# Altium PCB MOS双电机驱动.PcbDoc
Units mm, origin at the board's own origin, x right, y up, seen from the top; angles counter-clockwise.
Board outline 90 x 50 mm, 2 copper layers (Top Layer, Bottom Layer); 67 components, 44 nets, 198 pads, 182 vias.
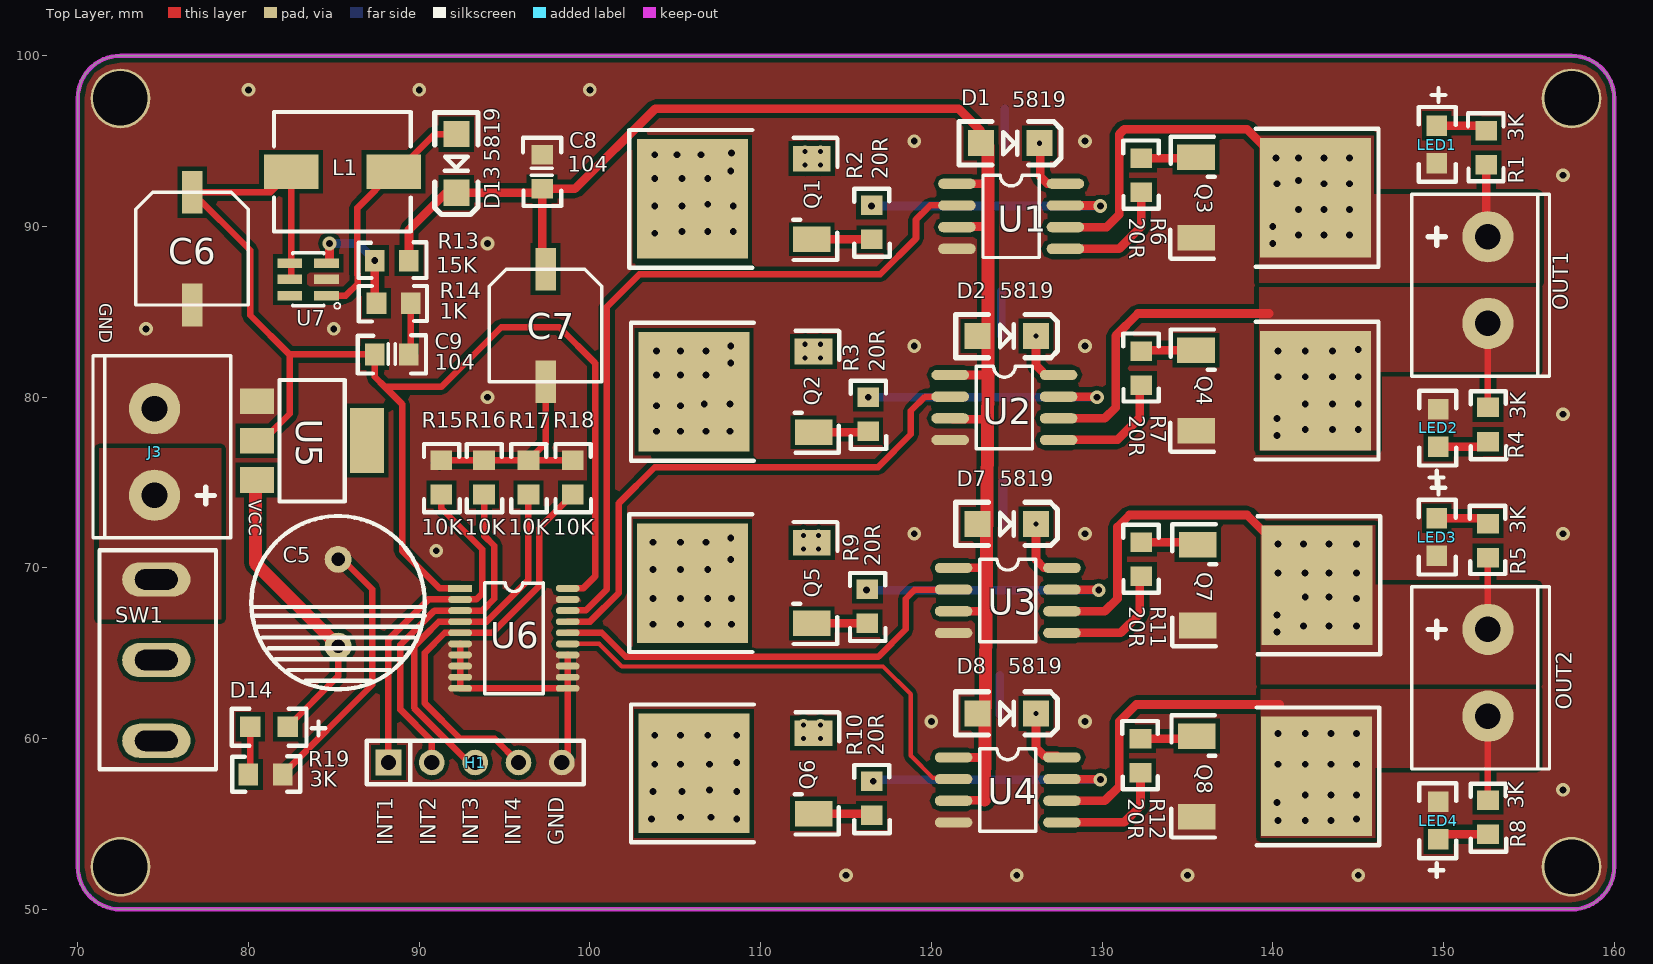
[diagram p0: Top Layer view]
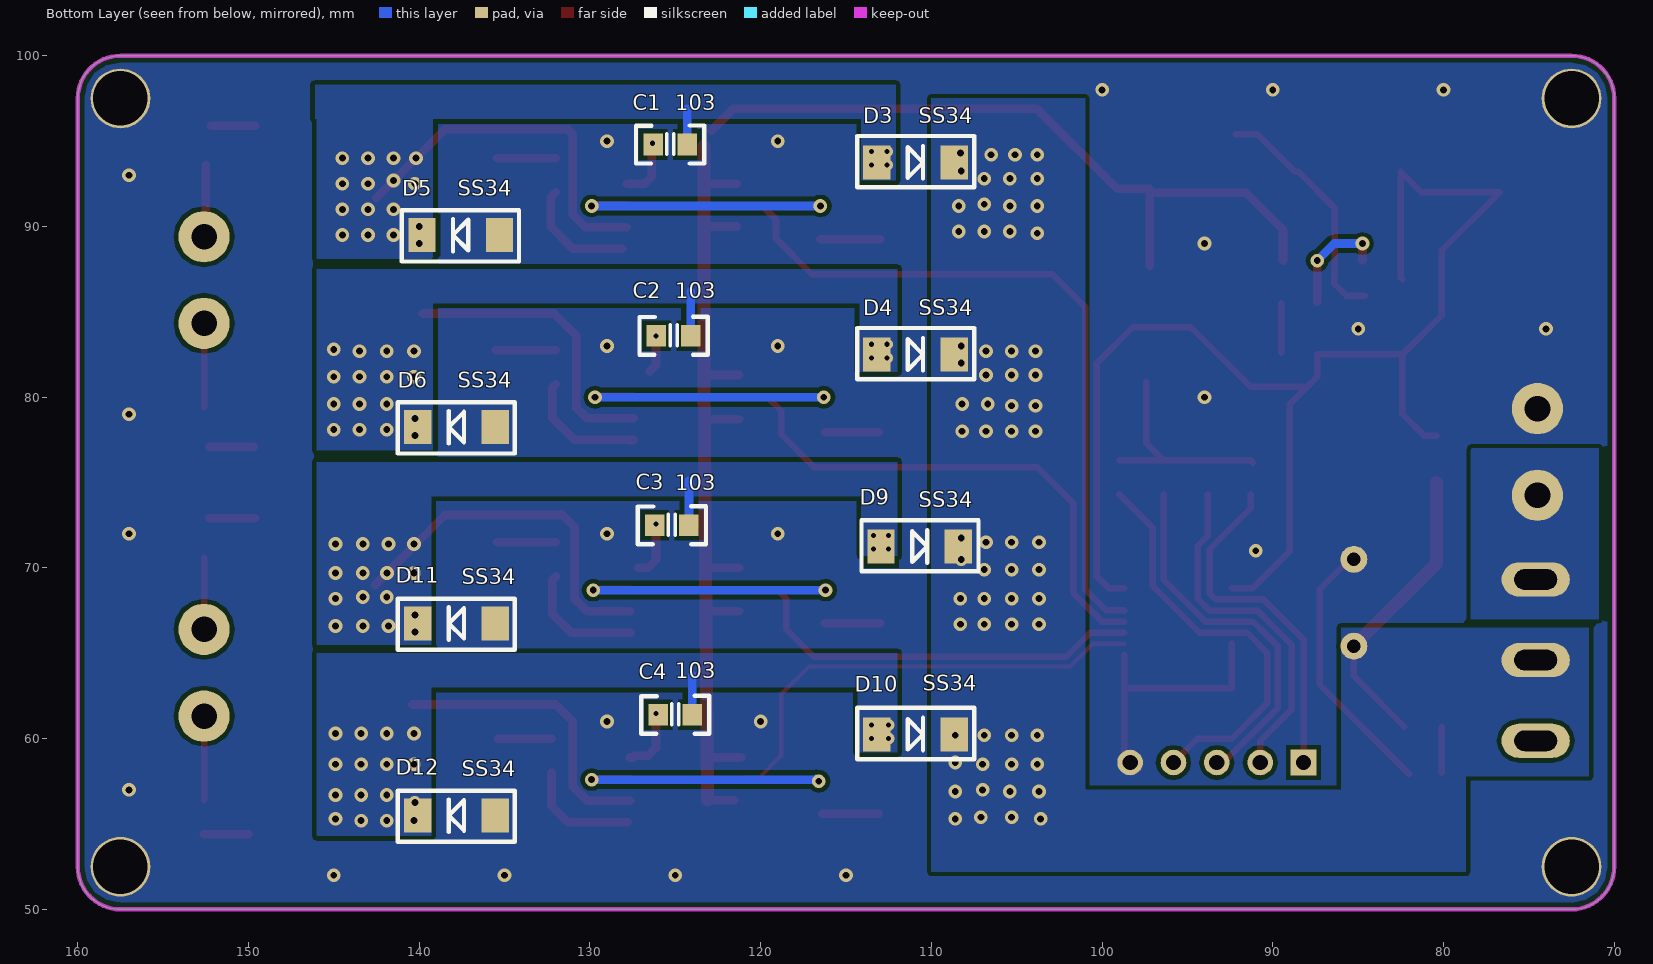
[diagram p1: Bottom Layer view, seen from below]
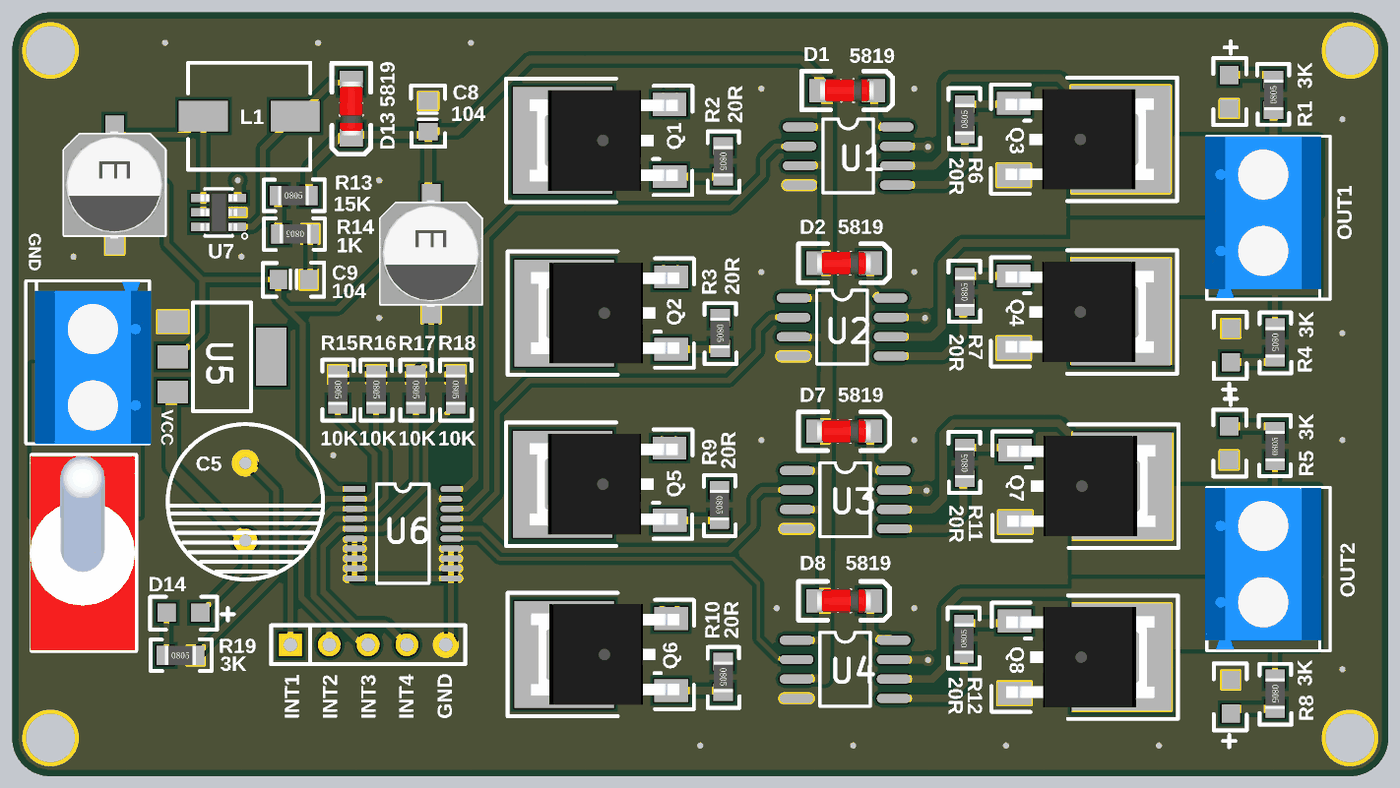
[diagram p2: 3D render of the assembled board from above, using the file's embedded part models]
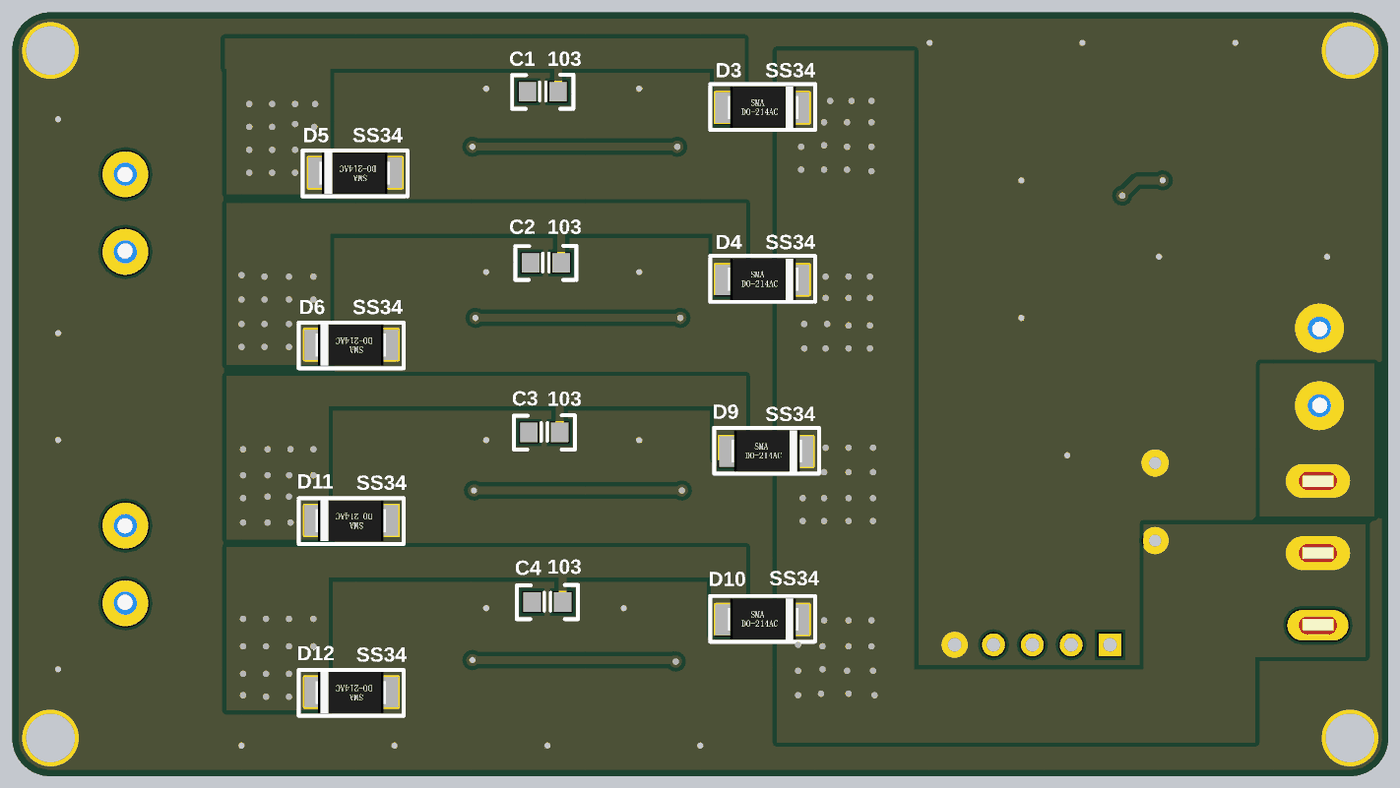
[diagram p3: 3D render of the assembled board from below, using the file's embedded part models]

## Layer stack, top to bottom
Top Solder: solder mask 0.0102, Solder Resist, Dk 3.5
Top Layer: signal copper 0.0356
Dielectric 1: dielectric 0.32, FR-4, Dk 4.8
Bottom Layer: signal copper 0.0356
Bottom Solder: solder mask 0.0102, Solder Resist, Dk 3.5

## Board outline
70,52.5 ccw(c72.5,52.5) 72.5,50 157.5,50 ccw(c157.5,52.5) 160,52.5 160,97.5 ccw(c157.5,97.5) 157.5,100 72.5,100 ccw(c72.5,97.5) 70,97.5

## Design rules (kind name [scope] priority, off if disabled: settings)
Clearance [All] p1: gap=0.254
PlaneConnect [All] p1: planeconnectstyle=Direct reliefexpansion=0.508 reliefentries=4 reliefconductorwidth=0.254 reliefairgap=0.254
PolygonConnect [All] p1: connectstyle=Direct reliefconductorwidth=0.254 reliefentries=4 polygonreliefangle="90 Angle" airgapwidth=0.254
RoutingVias [All] p1: holewidth=0.711 width=1.27 viastyle="Through Hole" minholewidth=0.711 minwidth=1.27 maxholewidth=0.711 maxwidth=1.27
SolderMaskExpansion [All] p1: expansion=0.102
Width [All] p1: maxlimit=2.54 minlimit=0.254 preferedwidth=0.381
29 further rules are at their usual default settings.

## Components (designator, comment, footprint, x,y, rotation, side; value= is the part's Value field where it differs from the comment)
C1 "103" "C 0805" 125.3,94.8 r180 bottom
C2 "103" "C 0805" 125.1,83.6 r180 bottom
C3 "103" "C 0805" 125.2,72.5 r180 bottom
C4 "103" "C 0805" 125,61.4 r180 bottom
C5 "1000uF" 直插电解电容10 85.25,70.5 r90 top
C6 "220uF" CAP6.6X6.6 76.7,85.4 r180 top
C7 "220uF" CAP6.6X6.6 97.4,80.9 r180 top
C8 "104" "C 0805" 97.2,93.2 r90 top
C9 "104" "C 0805" 88.4,82.5 r0 top
D1 "5819" D1206 124.7,94.8 r0 top
D2 "5819" D1206 124.5,83.5 r0 top
D3 "SS34" SMA 113,93.75 r180 bottom
D4 "SS34" SMA 113,82.5 r180 bottom
D5 "SS34" SMA 135.5,89.5 r0 bottom
D6 "SS34" SMA 135.75,78.25 r0 bottom
D7 "5819" D1206 124.5,72.5 r0 top
D8 "5819" D1206 124.5,61.4 r0 top
D9 "SS34" SMA 112.75,71.25 r180 bottom
D10 "SS34" SMA 113,60.25 r180 bottom
D11 "SS34" SMA 135.75,66.75 r0 bottom
D12 "SS34" SMA 135.75,55.5 r0 bottom
D13 "5819" D1206 92.1,93.6 r270 top
D14 "LED" 0805LED 81.2,60.6 r180 top
H1 "H?" SIP05 88.2,58.6 r0 top
J3 "Header2" 2PIN-5.08B 74.5,74.25 r90 top
L1 "15uH" L-06030 85.5,93.2 r0 top
LED1 "LED" 0805LED 149.7,94.8 r270 top
LED2 "LED" 0805LED 149.6,78.2 r90 top
LED3 "LED" 0805LED 149.7,71.8 r270 top
LED4 "LED" 0805LED 149.6,55.2 r90 top
OUT1 "Header2" 2PIN-5.08B 152.6,89.4 r270 top (schematic designator J1)
OUT2 "Header2" 2PIN-5.08B 152.6,66.4 r270 top (schematic designator J2)
Q1 "N-MOS" TO-252 113,89.25 r90 top
Q2 "N-MOS" TO-252 113.1,77.95 r90 top
Q3 "N-MOS" TO-252 135.5,94.05 r270 top
Q4 "N-MOS" TO-252 135.5,82.75 r270 top
Q5 "N-MOS" TO-252 113,66.75 r90 top
Q6 "N-MOS" TO-252 113.1,55.6 r90 top
Q7 "N-MOS" TO-252 135.6,71.35 r270 top
Q8 "N-MOS" TO-252 135.55,60.15 r270 top
R1 "3K" "R 0805" 152.5,94.6 r90 top
R2 "20R" "R 0805" 116.5,90.25 r270 top
R3 "20R" "R 0805" 116.3,79 r270 top
R4 "3K" "R 0805" 152.6,78.4 r270 top
R5 "3K" "R 0805" 152.6,71.6 r90 top
R6 "20R" "R 0805" 132.3,93 r90 top
R7 "20R" "R 0805" 132.3,81.7 r90 top
R8 "3K" "R 0805" 152.6,55.4 r270 top
R9 "20R" "R 0805" 116.25,67.75 r270 top
R10 "20R" "R 0805" 116.5,56.5 r270 top
R11 "20R" "R 0805" 132.3,70.5 r90 top
R12 "20R" "R 0805" 132.25,59 r90 top
R13 "15K" "R 0805" 88.4,88 r0 top
R14 "1K" "R 0805" 88.5,85.5 r180 top
R15 "10K" "R 0805" 91.3,75.3 r270 top
R16 "10K" "R 0805" 93.8,75.3 r270 top
R17 "10K" "R 0805" 96.4,75.3 r270 top
R18 "10K" "R 0805" 99,75.3 r270 top
R19 "3K" "R 0805" 81,57.9 r0 top
SW1 "SW-C" SW-TO3 74.6,64.6 r180 top
U1 "IR2104S" SOP-8 121.5,92.5 r0 top
U2 "IR2104S" SOP-8 121.1,81.3 r0 top
U3 "IR2104S" SOP-8 121.3,70 r0 top
U4 "IR2104S" SOP-8 121.3,58.9 r0 top
U5 "U?" SOT223 80.5,79.75 r270 top
U6 "74HC245" TSSOP-20 92.4,68.8 r0 top
U7 "MT3608" SOT23-6 83.5,86.9 r270 top

## Footprints (in the part's own frame and the unit in brackets; to place one, negate y for a bottom-side part, rotate by r counter-clockwise, add the part's x,y. Pads: shape width x height; smd on the part's side, far side on the other; paste and mask are expansions set on the pad)
2PIN-5.08B [mm] "3A"
  round 3 hole 1.5: 1(0,0) 2(5.08,0)
  silkscreen extent -2.49,-4.47 8.18,3.61, body extent -2.48,-4.58 8.12,3.02, height 10
0805LED [mm]
  rect 1.2x1.2 smd: 1(-1.1,-0.1) 2(1.1,-0.1)
  silkscreen extent -3.3,-1.14 2.18,1.02, body extent -1,-0.7 1,0.5, height 0.6
"C 0805" [mm]
  rect 1.143x1.27 smd: 1(-1,0) 2(1,0)
  silkscreen extent -2,-1.12 2,1.12, body extent -1,-0.5 1,0.5, height 0.51
CAP6.6X6.6 [mm] "SMDC"
  rect 1.2x2.5 smd: 1(0,0) 2(0,-6.6)
  silkscreen extent -3.3,-6.6 3.3,0, body extent -3.27,-6.8 3.33,0.2, height 5.2
D1206 [mil] "1/4W"
  rect 60x60 smd: 1(-71,3) 2(64,3)
  silkscreen extent -121,-47 114,53, body extent -73,-27 65,33, height 59
L-06030 [mm]
  rect 3.2x2 smd: 1(-3,0) 2(3,0)
  silkscreen extent -4,-3.5 4,3.5, body extent -3.7,-3.2 3.7,3.2, height 3
"R 0805" [mm]
  rect 1.143x1.27 smd: 1(-1,0) 2(1,0)
  silkscreen extent -1.96,-1.02 2.03,1.07, body extent -1,-0.63 1,0.63, height 0.55
SIP05 [mm]
  rect 1.5x1.5 hole 0.9: 1(0,0)
  round 1.5 hole 0.9: 2(2.54,0) 3(5.08,0) 4(7.62,0) 5(10.16,0)
  silkscreen extent -1.27,-1.27 11.43,1.27
SMA [mil] "DO-214AC(2010)"
  rect 63x78.74 smd: 1(-8,0) 2(170.56,0)
  silkscreen extent -53,-57 217,61, body extent -8,-52 174,54, height 94
SOP-8 [mm]
  oval 2.2x0.6 smd: 1(0,0) 2(0,-1.27) 3(0,-2.54) 4(0,-3.81) 5(6.35,-3.81) 6(6.35,-2.54) 7(6.35,-1.27) 8(6.35,0)
  silkscreen extent 1.52,-4.32 4.83,0.51, body extent 0,-4.32 6.35,0.51, height 2
SOT23-6 [mm] "SOT-23/SC-74A; 5 Leads; Body 3.1 x 3 mm, inc. leads (LxW max)"
  rect 0.55x1.45 smd: 1(0.95,1.075) 2(0,1.075) 3(-0.95,1.075) 4(-0.95,-1.075) 5(0,-1.075) 6(0.95,-1.075)
  silkscreen extent -1.55,-0.9 1.73,1.88, body extent -1.4,-1.19 1.4,1.23, height 1.08
SOT223 [mil]
  rect 150x79 smd: 0(89.88,253.54)
  rect 59x79 smd: 1(0,0) 2(90.55,0) 3(181.1,0)
  silkscreen extent -49,52 231,202, body extent -39,-12 217,276, height 39
SW-TO3 [mm]
  oval 4x2 hole 1.2 slot 2.5 at 0 deg: 1(0,-4.724) 2(0,0) 3(0,4.724)
  silkscreen extent -3.5,-6.43 3.33,6.39, body extent -3.43,-6.36 3.43,6.35, height 28.55
TO-252 [mm]
  rect 1.5x2.2 smd: 1(0,0) 3(4.723,0.004)
  rect 7x6.5 smd: 2(2.361,7)
  silkscreen extent -1.68,-1.5 6.4,10.69, body extent -0.93,-0.53 5.65,9.17, height 2.3
TSSOP-20 [mm]
  rect 1.4x0.4 smd: 1(0,0)
  oval 1.4x0.4 smd: 2(0,-0.65) 3(0,-1.3) 4(0,-1.95) 5(0,-2.6) 6(0,-3.25) 7(0,-3.9) 8(0,-4.55) 9(0,-5.2) 10(0,-5.85) 11(6.3,-5.85) 12(6.3,-5.2) 13(6.3,-4.55) 14(6.3,-3.9) 15(6.3,-3.25) 16(6.3,-2.6) 17(6.3,-1.95) 18(6.3,-1.3) 19(6.3,-0.65) 20(6.3,0)
  silkscreen extent 1.43,-6.17 4.87,0.33
直插电解电容10 [mil]
  round 62 hole 31.5: 1(0,0) 2(-200,0)
  silkscreen extent -300,-200 100,200

## Part data
C1 C2 C3 C4 C8 C9: library part CAP
C5 C6 C7: library part CAP-SMD
D1 D2 D7 D8 D13: library part D1206
D3 D4 D5 D6 D9 D10 D11 D12: library part D-SMA, "肖特基二极管"
H1: library part header5
L1: library part Inductance
R1 R2 R3 R4 R5 R6 R7 R8 R9 R10 R11 R12 R13 R14 R15 R16 R17 R18 R19: library part RES
U1 U2 U3 U4: "半桥驱动器"
U5: library part 1117

## Free pads (board coordinates)
  round 3.5 hole 3.2: 0(72.5,52.5) 0(72.5,97.5) 0(157.5,52.5) 0(157.5,97.5)

## Via types
v1: diameter 0.8, hole 0.4, Top Layer to Bottom Layer, tented both sides, 162 vias
v2: diameter 0.7, hole 0.3, Top Layer to Bottom Layer, tented both sides, 20 vias

## Nets (pads, with @x,y where several pads share a name; then routed paths per layer and width w, separated by ;. In a path a pad name is that pad's centre, name@x,y a point inside that pad or via, vN(x,y) a via of type N, cw(c..) or ccw(c..) an arc to the next point about the centre after c; other vN are vias at no path point)
GND: C5.1 C6.1 C7.1 C8.2 C9.2 D5.1 D6.1 D11.1 D12.1 H1.5 J3.2 LED1.2 LED2.2 LED3.2 LED4.2 pad.0 Q3.3 Q4.3 Q7.3 Q8.3 R14.1 R15.1 R16.1 R17.1 R18.1 R19.2 U1.4 U2.4 U3.4 U4.4 U5.1 U6.6 U6.7 U6.8 U6.9 U6.10 U6.11 U6.12 U6.13 U6.14 U6.19 U7.2 | length 46.3
  Top Layer w0.381: R19.2 87.25,63.15 87.25,68.75 C5.1@85.375,70.625 ; C9.2@89.5,82.6 R14.1 ; R15.1@91.167,76.167 R15.1 R16.1 R17.1 ; U6.6 U6.7 U6.8 U6.9 U6.10 U6.11 ; C7.1 97.4,77.3 R17.1 ; H1.5@98.7,58.94 U6.11 ; U6.14 U6.13 U6.12 U6.11 ; R18.1 R17.1
  other v1: 115,52 125,52 135,52 145,52 157,57 120,61 129,61 91,71 119,72 129,72 157,72 157,79 94,80 119,83 129,83 74,84 85,84 94,89 157,93 119,95 129,95 80,98 90,98 100,98
INT1: H1.1 R15.2 U6.2 | length 20.6
  Top Layer w0.381: H1.1 88.2,65.811 90.544,68.155 U6.2@92.395,68.155 ; R15.2 91.3,73.5 93.7,71.1 93.7,68.5 93.35,68.15 U6.2
INT2: H1.2 R16.2 U6.3 | length 20.6
  Top Layer w0.381: H1.2 90.74,59.86 88.9,61.7 88.9,65.5 89.999,66.599 90.9,67.5 U6.3 93.702,67.5 94.4,68.198 94.4,71.298 93.8,71.898 R16.2
INT3: H1.3 R17.2 U6.4 | length 21.8
  Top Layer w0.381: U6.4 91.15,66.85 90.248,65.948 89.7,65.4 89.7,61.8 92.9,58.6 H1.3 ; U6.4@92.405,66.855 93.955,66.855 96.4,69.3 R17.2
INT4: H1.4 R18.2 U6.5 | length 24.4
  Top Layer w0.381: H1.4 94.42,60 92.4,60 90.335,62.065 90.335,65.035 91.5,66.2 U6.5 94.298,66.2 97.035,68.937 97.035,72.335 R18.2
NetC1_1: C1.1 D1.2 U1.8 | length 3.6
  Top Layer w0.508: D1.2@126.376,94.876 126.376,92.924 126.8,92.5 U1.8
  other v2: 126.326,94.876
NetC2_1: C2.1 D2.2 U2.8 | length 1.7
  Top Layer w0.508: D2.2@126.126,83.076 126.126,81.874 U2.8@126.5,81.5
  other v2: 126.126,83.576
NetC3_1: C3.1 D7.2 U3.8 | length 2.9
  Top Layer w0.508: D7.2@126.126,72.076 126.126,70.474 126.6,70 U3.8@127.2,70
  other v2: 126.126,72.576
NetC4_1: C4.1 D8.2 U4.8 | length 3.2
  Top Layer w0.508: D8.2@126.126,61.076 126.126,59.474 126.6,59 U4.8@127.374,59 ; U4.8@127.474,58.9 U4.8
  other v2: 126.126,61.476
NetD13_1: D13.1 L1.2 U7.1 | length 13.9
  Top Layer w0.381: U7.1 85.7,85.95 86.4,86.65 86.4,87.165 86.384,87.181 86.384,91.084 L1.2 ; L1.2@88.7,93.2 90.903,95.403 D13.1
NetD14_2: D14.2 R19.1 | length 2.7
  Top Layer w0.381: R19.1@80.1,58 D14.2
NetJ3_1: J3.1 SW1.1
NetLED1_1: LED1.1 R1.2 | length 2.6
  Top Layer w0.508: LED1.1 R1.2@152.2,95.9
NetLED2_1: LED2.1 R4.2 | length 2.6
  Top Layer w0.508: LED2.1 R4.2@152.3,77.1
NetLED3_1: LED3.1 R5.2 | length 2.7
  Top Layer w0.508: LED3.1 R5.2@152.3,72.9
NetLED4_1: LED4.1 R8.2 | length 2.6
  Top Layer w0.508: LED4.1@150,54.4 R8.2
NetQ1_1: Q1.1 R2.2 | length 3.5
  Top Layer w0.508: Q1.1 R2.2
NetQ2_1: Q2.1 R3.2 | length 3.2
  Top Layer w0.508: Q2.1 R3.2@116.25,77.95
NetQ3_1: Q3.1 R6.2 | length 3.5
  Top Layer w0.508: R6.2@132,94 Q3.1@135.45,94
NetQ4_1: Q4.1 R7.2 | length 3.5
  Top Layer w0.508: R7.2@132,82.75 Q4.1
NetQ5_1: Q5.1 R9.2 | length 3.3
  Top Layer w0.508: Q5.1 R9.2
NetQ6_1: Q6.1 R10.2 | length 3.3
  Top Layer w0.508: Q6.1 R10.2@116.4,55.6
NetQ7_1: Q7.1 R11.2 | length 3.4
  Top Layer w0.508: R11.2@132,71.5 Q7.1@135.45,71.5
NetQ8_1: Q8.1 R12.2 | length 3.1
  Top Layer w0.508: R12.2 Q8.1@135.4,60
NetR2_1: R2.1 U1.7 | length 15.4
  Top Layer w0.508: U1.7 v1@129.87,91.23
  Bottom Layer w0.508: v1(116.5,91.2) v1(129.9,91.2)
NetR3_1: R3.1 U2.7 | length 15.6
  Top Layer w0.508: U2.7 v1@129.67,80.03
  Bottom Layer w0.508: v1(116.3,80) v1(129.7,80)
NetR6_1: R6.1 U1.5 | length 6.9
  Top Layer w0.508: U1.5@128.1,88.7 131,88.7 132.3,90 132.3,91.7 R6.1@132,92
NetR7_1: R7.1 U2.5 | length 7.3
  Top Layer w0.508: U2.5 127.71,77.49 127.7,77.5 130.9,77.5 132.2,78.8 132.2,80.55 R7.1@132,80.75
NetR9_1: R9.1 U3.7 | length 15.7
  Top Layer w0.508: U3.7 v1@129.77,68.73
  Bottom Layer w0.508: v1(116.2,68.7) v1(129.8,68.7)
NetR10_1: R10.1 U4.7 | length 15.6
  Top Layer w0.508: U4.7 v1@129.87,57.63
  Bottom Layer w0.508: v1(116.6,57.5) 116.743,57.643 116.786,57.6 v1(129.9,57.6)
NetR11_1: R11.1 U3.5 | length 7.3
  Top Layer w0.508: U3.5@127.6,66.2 131.1,66.2 132.2,67.3 132.2,69.3 R11.1@132,69.5
NetR12_1: R12.1 U4.5 | length 6.8
  Top Layer w0.508: U4.5@127.8,55.1 131.3,55.1 132.25,56.05 R12.1
NetR13_1: R13.1 R14.2 U7.3 | length 6.4
  Top Layer w0.508: U7.3@84.75,88.025 v1(84.75,89) ; R14.2@87.4,85.6 v1(87.4,88)
  Bottom Layer w0.508: v1(84.75,89) 86.4,89 v1(87.4,88)
OUT1: C1.2 D3.1 D5.2 OUT1.1 Q1.3 Q3.2 R1.1 U1.6 | length 27.6
  Top Layer w0.508: U1.6 130.26,89.96 131,90.7 131,95.4 131.3,95.7 138.489,95.7 Q3.2 ; OUT1.1@152.5,89.5 R1.1
  Bottom Layer w0.508: C1.2 124.3,96.9
  other v1: 140,89 141.5,89.5 143,89.5 144.5,89.5 140,90 141.5,91 143,91 144.5,91 140.25,92.5 143,92.5 144.5,92.5 141.5,92.689 140.189,94 141.5,94 143,94 144.5,94
  other v2: 112.6,93.6 113.5,93.6 112.6,94.4 113.5,94.4
OUT2: C2.2 D4.1 D6.2 OUT1.2 Q2.3 Q4.2 R4.1 U2.6 | length 24.9
  Top Layer w0.381: R4.1 OUT1.2
  Top Layer w0.508: U2.6 130.16,78.76 130.8,79.4 130.8,83.6 132.1,84.9 139.8,84.9
  Bottom Layer w0.508: C2.2 124.1,86.2
  other v1: 140.25,77.75 141.9,78.1 143.5,78.1 145,78.1 140.25,78.75 141.9,79.6 143.5,79.6 145,79.6 140.3,81.2 141.9,81.2 143.5,81.2 145,81.2 140.3,82.7 141.9,82.7 143.5,82.7 145,82.8
  other v2: 112.6,82.3 113.5,82.3 112.6,83.1 113.5,83.1
OUT3: C3.2 D9.1 D11.2 OUT2.1 Q5.3 Q7.2 R5.1 U3.6 | length 28.2
  Top Layer w0.381: OUT2.1 R5.1
  Top Layer w0.508: U3.6 130.16,67.46 130.9,68.2 130.9,72.4 131.6,73.1 138.489,73.1 Q7.2
  Bottom Layer w0.508: C3.2 124.2,75.1
  other v1: 140.25,66.25 141.8,66.6 143.3,66.6 144.9,66.6 140.25,67.25 144.9,68.2 141.9,68.3 143.3,68.3 140.3,69.7 141.889,69.7 143.3,69.7 144.9,69.7 140.3,71.4 141.8,71.4 143.3,71.4 144.9,71.4
  other v2: 112.5,71.1 113.4,71.1 112.5,71.9 113.4,71.9
OUT4: C4.2 D10.1 D12.2 OUT2.2 Q6.3 Q8.2 R8.1 U4.6 | length 24.5
  Top Layer w0.381: R8.1 OUT2.2
  Top Layer w0.508: U4.6 130.16,56.36 131,57.2 131,61 132,62 140.4,62
  Bottom Layer w0.508: C4.2 124,63.7
  other v1: 140.3,55.2 141.9,55.2 143.4,55.2 144.9,55.3 140.25,56.25 141.9,56.7 143.4,56.7 144.9,56.7 140.3,58.5 141.9,58.5 143.4,58.5 144.9,58.5 140.3,60.3 141.9,60.3 143.4,60.3 144.9,60.3
  other v2: 112.5,60 113.5,60 112.5,60.8 113.5,60.8
PWM1: U1.2 U6.18 | length 43
  Top Layer w0.381: U6.18 98.706,67.506 99.758,67.506 101,68.748 101,85.3 102.9,87.2 117,87.2 119.1,89.3 119.1,90.4 119.93,91.23 U1.2
PWM2: U2.2 U6.17 | length 31.2
  Top Layer w0.381: U6.17 98.705,66.855 100.006,66.855 101.7,68.55 101.7,73.8 103.8,75.9 116.9,75.9 116.9,75.924 118.8,77.824 118.8,79.2 119.63,80.03 U2.2@120.517,80.03
PWM3: U3.2 U6.16 | length 25.9
  Top Layer w0.381: U6.16 100.7,66.2 102.1,64.8 116.9,64.8 118.5,66.4 118.5,68.2 119.03,68.73 U3.2
PWM4: U4.2 U6.15 | length 27.6
  Top Layer w0.254: U6.15 100.542,65.55 101.863,64.229 117.171,64.229 118.8,62.6 118.8,59 120.1,57.7 U4.2@120.9,57.7
VCC: C5.2 D3.2 D4.2 D9.2 D10.2 D14.1 Q1.2 Q2.2 Q5.2 Q6.2 SW1.2 U5.3 | length 17.5
  Top Layer w0.381: D14.1 85.25,63.65 C5.2@85.25,65.428
  Top Layer w0.762: U5.3@80.4,75 80.4,70.278 C5.2@85.25,65.428
  other v1: 103.6,55.3 108.6,55.3 105.3,55.4 107.1,55.4 103.7,56.9 105.4,56.9 108.6,56.9 107,57 103.8,58.5 105.3,58.5 107,58.5 108.6,58.6 103.8,60.2 105.3,60.2 106.9,60.2 108.6,60.2 103.7,66.7 105.3,66.7 106.9,66.7 108.3,66.7 103.7,68.2 105.3,68.2 106.9,68.2 108.3,68.2 103.7,69.9 105.3,69.9 106.9,69.9 108.25,70.5 103.7,71.5 105.3,71.5 106.8,71.5 108.25,71.75 103.9,78 105.3,78 106.8,78 108.2,78 103.9,79.5 105.3,79.5 106.7,79.6 108.2,79.6 103.9,81.3 105.3,81.3 106.8,81.3 108.25,82 103.9,82.7 105.3,82.7 106.8,82.7 108.25,83 103.8,89.6 105.4,89.7 106.9,89.7 108.4,89.7 103.8,91.2 105.4,91.2 108.4,91.2 106.9,91.3 103.8,92.8 105.4,92.8 106.9,92.8 108.25,93.25 103.8,94.2 105.1,94.2 106.5,94.2 108.3,94.3
VCC5V: C6.2 C9.1 L1.1 U5.2 U6.1 U6.20 U7.4 U7.5 | length 81
  Top Layer w0.381: U5.2@80.4,77.75 81.15,77.75 82.425,79.025 82.425,82.475 82.4,82.5 ; U7.5 82.5,86.975 L1.1 81.3,92 C6.2 80.1,88.6 80.1,84.8 82.4,82.5 ; U6.1 91.2,68.8 89,71 89,71.618 89,79.594 87.994,80.6 ; U6.20 99.6,68.8 100.3,69.5 100.3,82 98.2,84.1 94.8,84.1 91.3,80.6 87.994,80.6 ; 82.4,82.5 C9.1 87.4,81.194 87.994,80.6
VCC15V: C7.2 C8.1 D1.1 D2.1 D7.1 D8.1 D13.2 R13.2 U1.1 U1.3 U2.1 U2.3 U3.1 U3.3 U4.1 U4.3 | length 95.4
  Top Layer w0.508: R13.2 89.4,89.8 91.574,91.974 D13.2 C8.1@96.974,91.974 ; C7.2@97.2,87.7 C8.1 99.12,92.2 103.82,96.9 121.6,96.9 D1.1@122.897,95.603 ; U4.1@121.15,58.9 123.008,58.9 ; U3.3@121.25,67.46 123.068,67.46 ; U3.1@121.25,70 123.108,70 ; U2.3@121.25,78.71 123.068,78.71 ; U2.1@121.25,81.3 123.308,81.3 ; U1.3@121.4,90 123.008,90 ; U1.1@121.4,92.5 123.008,92.5 ; U4.3@121.55,56.4 123.108,56.4
  Top Layer w0.762: 123.108,56.4 123.308,81.3 D1.1@123.308,94.7
pads on no net: SW1.3 U5.0 U7.6

## Polygon pours and split planes (outlines as drawn)
GND on Bottom Layer "GND_L02_P056" (solid, remove dead copper, pour order 56): 70,100 70,50 160,50 160,100
NetJ3_1 on Bottom Layer "NETJ3_1_L02_P048" (solid, remove dead copper, pour order 48): 70.9,77 78.5,77 78.4,76.9 78.4,67 70.9,67
VCC on Bottom Layer "VCC_L02_P002" (solid, remove dead copper, pour order 2): 71.486,66.5 82,66.5 86,66.5 86,62.5 86,57 110,57 110,52.2 78.686,52.2 78.686,57.8 71.486,57.8
OUT4 on Bottom Layer "OUT4_L02_P032" (solid, remove dead copper, pour order 32): 139.3,54.3 146,54.3 146,65 139.3,65
OUT3 on Bottom Layer "OUT3_L02_P028" (solid, remove dead copper, pour order 28): 146,76.2 146,65.5 139.3,65.5 139.3,76.2
OUT2 on Bottom Layer "OUT2_L02_P024" (solid, remove dead copper, pour order 24): 139.2,76.9 146,76.9 146,87.5 139.2,87.5
OUT1 on Bottom Layer "OUT1_L02_P020" (solid, remove dead copper, pour order 20): 139.2,98.3 139.2,88.2 139.3,88.1 146,88.1 146,98.2 146.1,98.3
OUT4 on Bottom Layer "OUT4_L02_P030" (solid, remove dead copper, pour order 30): 112,65 112,59.2 114.3,59.2 114.3,65
OUT3 on Bottom Layer "OUT3_L02_P026" (solid, remove dead copper, pour order 26): 112,76.2 112,70.7 114,70.7 114.1,70.6 114.1,76.2
OUT2 on Bottom Layer "OUT2_L02_P022" (solid, remove dead copper, pour order 22): 112,81.5 114.2,81.5 114.2,87.5 112,87.5
OUT1 on Bottom Layer "OUT1_L02_P018" (solid, remove dead copper, pour order 18): 112.1,98.3 112.1,92.7 114.1,92.7 114.1,98.3
VCC on Bottom Layer "VCC_L02_P000" (solid, remove dead copper, pour order 0): 101,97.5 110,97.5 110,52.4 105.8,52.4 101,52.4
OUT1 on Bottom Layer "OUT1_L02_P010" (solid, remove dead copper, pour order 10): 112.1,98.3 112.1,96.3 146.1,96.3 146.1,98.3
OUT2 on Bottom Layer "OUT2_L02_P012" (solid, remove dead copper, pour order 12): 112,87.5 112,85.5 146,85.5 146,87.5
OUT3 on Bottom Layer "OUT3_L02_P014" (solid, remove dead copper, pour order 14): 112,76.2 112,74.2 146,74.2 146,76.2
OUT4 on Bottom Layer "OUT4_L02_P016" (solid, remove dead copper, pour order 16): 112,65 112,63 146,63 146,65
GND on Top Layer "GND_L01_P054" (solid, remove dead copper, pour order 54): 70,100 70,50 160,50 160,100
NetJ3_1 on Top Layer "NETJ3_1_L01_P046" (solid, remove dead copper, pour order 46): 71.25,77 78.4,77 78.4,67 71.25,67
OUT4 on Top Layer "OUT4_L01_P044" (solid, remove dead copper, pour order 44): 139.3,54.2 146,54.2 146,58.3 155.5,58.3 155.5,62.9 139.3,62.9
OUT3 on Top Layer "OUT3_L01_P042" (solid, remove dead copper, pour order 42): 139.3,72.5 146,72.5 146,69 155.5,69 155.5,63.7 155.5,63.2 139.3,63.2
OUT2 on Top Layer "OUT2_L01_P040" (solid, remove dead copper, pour order 40): 139.2,76.9 146.1,76.9 146.1,81.5 155.5,81.5 155.5,86.5 139.2,86.5
OUT1 on Top Layer "OUT1_L01_P038" (solid, remove dead copper, pour order 38): 139.2,95.3 139.2,86.7 155.6,86.7 155.6,91.8 155.5,91.9 148.1,91.9 145.9,91.9 145.9,95.3

## Keep-outs
Keep-Out Layer:
  the board outline again, w0.254

## Silkscreen, mask and mechanical layers (free items; w line width, h text height)
Top Overlay:
  text "GND" at 71,85.5 h1.27 r270
  text "VCC" at 79.75,74 h1.27 r270
  text "INT1" at 88.75,53.75 h1.52 r90
  text "INT2" at 91.25,53.75 h1.52 r90
  text "INT3" at 93.75,53.75 h1.52 r90
  text "INT4" at 96.25,53.75 h1.52 r90
  text "GND" at 98.75,53.75 h1.52 r90